# Altium PCB blackfin_pcb.PcbDoc (part 3 of 4)
Units mil, origin at the board's own origin, x right, y up, seen from the top; angles counter-clockwise.
Board outline 4330.71 x 5905.51 mil, 4 copper layers (Top Layer, GROUND, POWER, Bottom Layer), stack 59.76 mil thick; 381 components, 314 nets, 1218 pads, 647 vias.
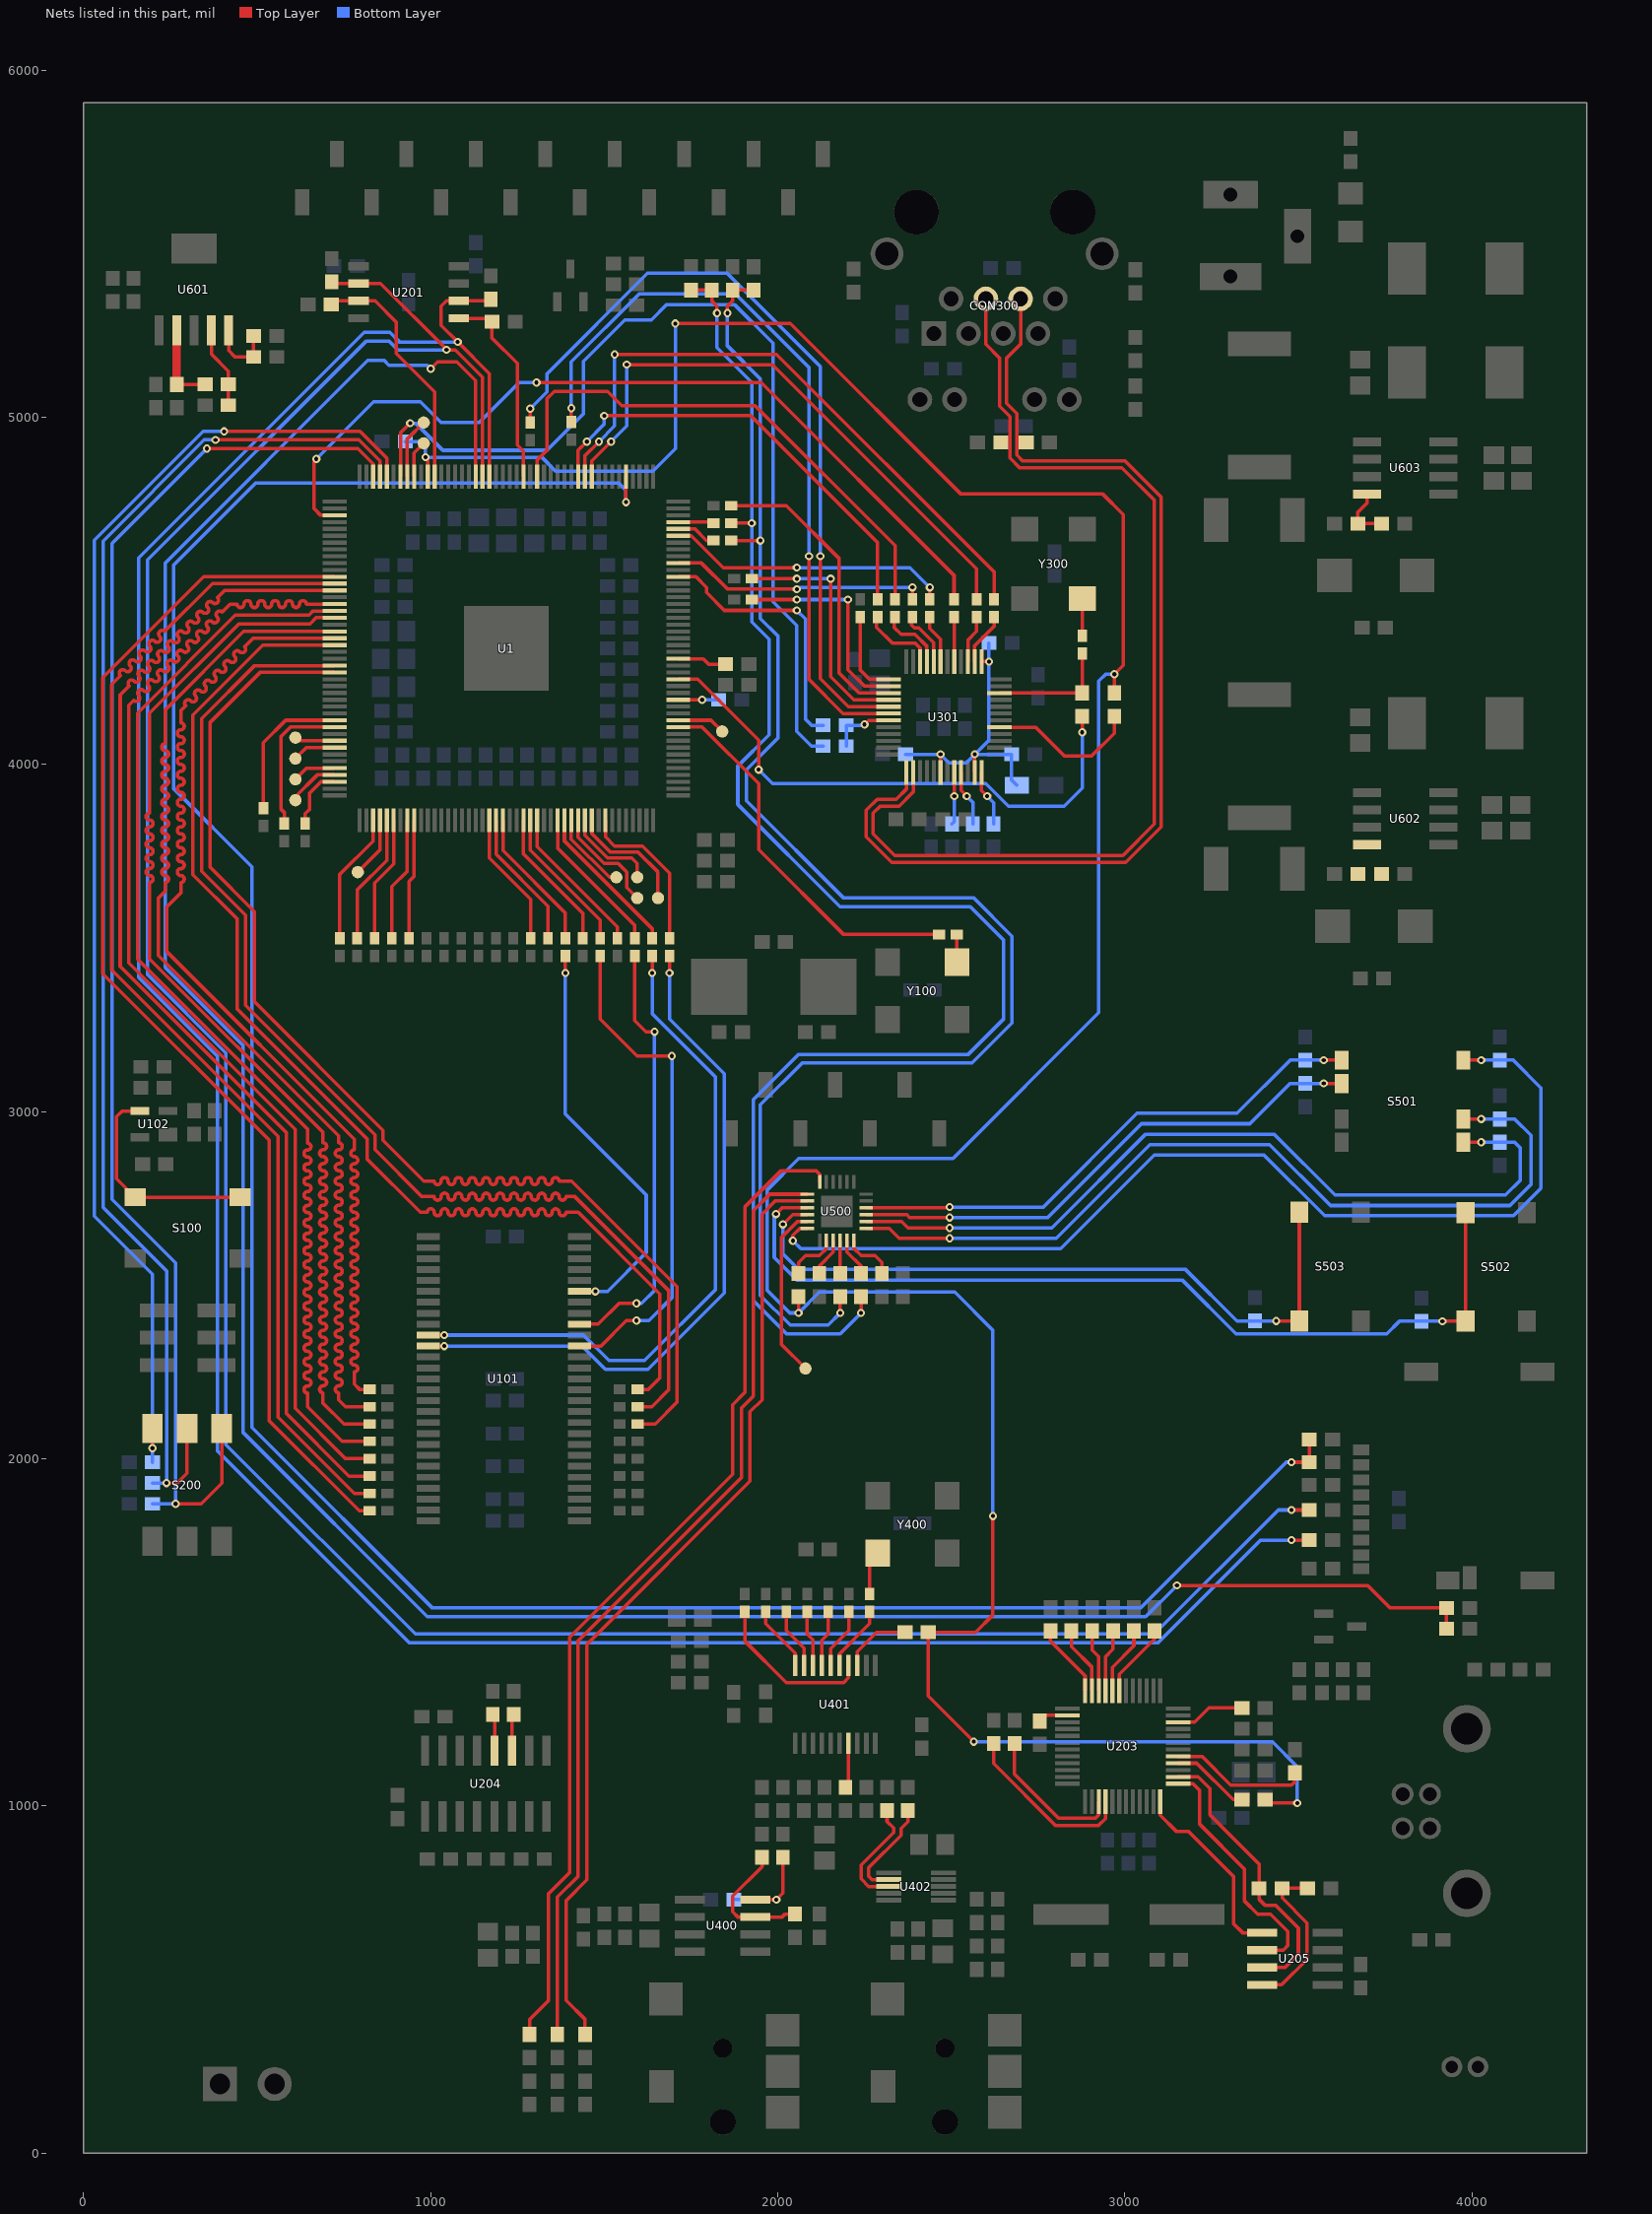
[diagram p5: the nets of this part, all layers, seen from the top]

## Via types
v1: diameter 23.62, hole 11.81, Top Layer to Bottom Layer, tented both sides, 566 vias
v2: diameter 55.12, hole 31.5, Top Layer to Bottom Layer, 36 vias
v3: diameter 25.98, hole 12.99, Top Layer to Bottom Layer, tented top, 29 vias
v4: diameter 157.48, hole 98.43, Top Layer to Bottom Layer, 8 vias
v5: diameter 137.8, hole 90.55, Top Layer to Bottom Layer, 4 vias
v6: diameter 55.12, hole 31.5, Top Layer to Bottom Layer, tented both sides, 4 vias

## Nets (pads, with @x,y where several pads share a name; then routed paths per layer and width w, separated by ;. In a path a pad name is that pad's centre, name@x,y a point inside that pad or via, vN(x,y) a via of type N, cw(c..) or ccw(c..) an arc to the next point about the centre after c; other vN are vias at no path point) (continued)
NetR111_1: R111.1 U1.70 | length 3528.7
  Top Layer w10: U1.70@723.03,4265.08 508.3,4265.08 365,4121.78 365,3703.15 491.85,3576.3 491.85,3316.82 862.55,2946.12 862.55,2917.45 980,2800 1010,2800 ccw(c1020,2800) 1030,2800 cw(c1040,2800) 1050,2800 ccw(c1060,2800) 1070,2800 cw(c1080,2800) 1090,2800 ccw(c1100,2800) 1110,2800 cw(c1120,2800) 1130,2800 ccw(c1140,2800) 1150,2800 cw(c1160,2800) 1170,2800 ccw(c1180,2800) 1190,2800 cw(c1200,2800) 1210,2800 ccw(c1220,2800) 1230,2800 cw(c1240,2800) 1250,2800 ccw(c1260,2800) 1270,2800 cw(c1280,2800) 1290,2800 ccw(c1300,2800) 1310,2800 cw(c1320,2800) 1330,2800 ccw(c1340,2800) 1350,2800 cw(c1360,2800) 1370,2800 1405.71,2800 1710,2495.71 1710,2163 1647,2100 R111.1@1595.59,2100
NetR112_2: R112.2 U1.97 | length 345.2
  Top Layer w10: R112.2@938.11,3499.57 938.11,3663.11 952.36,3677.36 U1.97@952.36,3838.9
NetR113_1: R113.1 U1.69 | length 3521.9
  Top Layer w10: U1.69@723.03,4284.76 492.63,4284.76 340,4132.13 340,3692.8 466.85,3565.95 466.85,3306.46 840,2933.31 840,2890 975,2755 1010,2755 ccw(c1020,2755) 1030,2755 cw(c1040,2755) 1050,2755 ccw(c1060,2755) 1070,2755 cw(c1080,2755) 1090,2755 ccw(c1100,2755) 1110,2755 cw(c1120,2755) 1130,2755 ccw(c1140,2755) 1150,2755 cw(c1160,2755) 1170,2755 ccw(c1180,2755) 1190,2755 cw(c1200,2755) 1210,2755 ccw(c1220,2755) 1230,2755 cw(c1240,2755) 1250,2755 ccw(c1260,2755) 1270,2755 cw(c1280,2755) 1290,2755 ccw(c1300,2755) 1310,2755 cw(c1320,2755) 1330,2755 ccw(c1340,2755) 1350,2755 cw(c1360,2755) 1370,2755 ccw(c1380,2755) 1390,2755 1415.36,2755 1685,2485.36 1685,2197.56 1637.44,2150 R113.1@1595.59,2150
NetR114_2: R114.2 U1.96 | length 357.8
  Top Layer w10: R114.2@888.11,3499.57 888.11,3648.11 932.68,3692.68 U1.96@932.68,3838.9
NetR115_1: R115.1 U1.66 | length 3531.2
  Top Layer w10: U1.66@723.03,4343.82 516.33,4343.82 315,4142.49 315,3682.44 441.85,3555.59 441.85,3296.11 816.48,2921.48 816.48,2863.52 970,2710 990,2710 cw(c1000,2710) 1010,2710 ccw(c1020,2710) 1030,2710 cw(c1040,2710) 1050,2710 ccw(c1060,2710) 1070,2710 cw(c1080,2710) 1090,2710 ccw(c1100,2710) 1110,2710 cw(c1120,2710) 1130,2710 ccw(c1140,2710) 1150,2710 cw(c1160,2710) 1170,2710 ccw(c1180,2710) 1190,2710 cw(c1200,2710) 1210,2710 ccw(c1220,2710) 1230,2710 cw(c1240,2710) 1250,2710 ccw(c1260,2710) 1270,2710 cw(c1280,2710) 1290,2710 ccw(c1300,2710) 1310,2710 cw(c1320,2710) 1330,2710 ccw(c1340,2710) 1350,2710 cw(c1360,2710) 1370,2710 ccw(c1380,2710) 1390,2710 1425,2710 1660,2475 1660,2232.56 1627.44,2200 R115.1@1595.59,2200
NetR116_2: R116.2 U1.94 | length 362.2
  Top Layer w10: R116.2@838.11,3499.57 838.11,3658.11 893.31,3713.31 U1.94@893.31,3838.9
NetR117_1: R117.1 U1.65 | length 3525.1
  Top Layer w10: U1.65@723.03,4363.5 488.5,4363.5 463.85,4338.85 cw(c456.78,4331.78) 449.71,4324.71 ccw(c442.63,4317.63) 435.56,4310.56 cw(c428.49,4303.49) 421.42,4296.42 ccw(c414.35,4289.35) 407.28,4282.28 cw(c400.21,4275.21) 393.14,4268.14 ccw(c386.07,4261.07) 378.99,4253.99 cw(c371.92,4246.92) 364.85,4239.85 ccw(c357.78,4232.78) 350.71,4225.71 cw(c343.64,4218.64) 336.57,4211.57 ccw(c329.5,4204.5) 322.43,4197.43 cw(c315.36,4190.36) 308.28,4183.28 ccw(c301.21,4176.21) 294.14,4169.14 280,4155 280,4120 cw(c280,4110) 280,4100 ccw(c280,4090) 280,4080 cw(c280,4070) 280,4060 ccw(c280,4050) 280,4040 cw(c280,4030) 280,4020 ccw(c280,4010) 280,4000 cw(c280,3990) 280,3980 ccw(c280,3970) 280,3960 cw(c280,3950) 280,3940 ccw(c280,3930) 280,3920 cw(c280,3910) 280,3900 ccw(c280,3890) 280,3880 cw(c280,3870) 280,3860 ccw(c280,3850) 280,3840 cw(c280,3830) 280,3820 ccw(c280,3810) 280,3800 cw(c280,3790) 280,3780 ccw(c280,3770) 280,3760 cw(c280,3750) 280,3740 ccw(c280,3730) 280,3720 cw(c280,3710) 280,3700 ccw(c280,3690) 280,3680 cw(c280,3670) 280,3660 280,3630 240,3590 240,3460.44 780,2920.44 780,2890 ccw(c780,2880) 780,2870 cw(c780,2860) 780,2850 ccw(c780,2840) 780,2830 cw(c780,2820) 780,2810 ccw(c780,2800) 780,2790 cw(c780,2780) 780,2770 ccw(c780,2760) 780,2750 cw(c780,2740) 780,2730 ccw(c780,2720) 780,2710 cw(c780,2700) 780,2690 ccw(c780,2680) 780,2670 cw(c780,2660) 780,2650 ccw(c780,2640) 780,2630 cw(c780,2620) 780,2610 ccw(c780,2600) 780,2590 cw(c780,2580) 780,2570 ccw(c780,2560) 780,2550 cw(c780,2540) 780,2530 ccw(c780,2520) 780,2510 cw(c780,2500) 780,2490 ccw(c780,2480) 780,2470 cw(c780,2460) 780,2450 ccw(c780,2440) 780,2430 cw(c780,2420) 780,2410 ccw(c780,2400) 780,2390 cw(c780,2380) 780,2370 ccw(c780,2360) 780,2350 cw(c780,2340) 780,2330 ccw(c780,2320) 780,2310 cw(c780,2300) 780,2290 ccw(c780,2280) 780,2270 cw(c780,2260) 780,2250 780,2215 795,2200 R117.1@824.41,2200
NetR118_2: R118.2 U1.93 | length 374.8
  Top Layer w10: R118.2@788.11,3499.57 788.11,3638.11 873.62,3723.62 U1.93@873.62,3838.9
NetR119_1: R119.1 U1.64 | length 3529.5
  Top Layer w10: U1.64@723.03,4383.19 461.01,4383.19 235,4157.17 235,4060 ccw(c235,4050) 235,4040 cw(c235,4030) 235,4020 ccw(c235,4010) 235,4000 cw(c235,3990) 235,3980 ccw(c235,3970) 235,3960 cw(c235,3950) 235,3940 ccw(c235,3930) 235,3920 cw(c235,3910) 235,3900 ccw(c235,3890) 235,3880 cw(c235,3870) 235,3860 ccw(c235,3850) 235,3840 cw(c235,3830) 235,3820 ccw(c235,3810) 235,3800 cw(c235,3790) 235,3780 ccw(c235,3770) 235,3760 cw(c235,3750) 235,3740 ccw(c235,3730) 235,3720 cw(c235,3710) 235,3700 ccw(c235,3690) 235,3680 cw(c235,3670) 235,3660 235,3635 215,3615 215,3450.09 735,2930.09 735,2910 cw(c735,2900) 735,2890 ccw(c735,2880) 735,2870 cw(c735,2860) 735,2850 ccw(c735,2840) 735,2830 cw(c735,2820) 735,2810 ccw(c735,2800) 735,2790 cw(c735,2780) 735,2770 ccw(c735,2760) 735,2750 cw(c735,2740) 735,2730 ccw(c735,2720) 735,2710 cw(c735,2700) 735,2690 ccw(c735,2680) 735,2670 cw(c735,2660) 735,2650 ccw(c735,2640) 735,2630 cw(c735,2620) 735,2610 ccw(c735,2600) 735,2590 cw(c735,2580) 735,2570 ccw(c735,2560) 735,2550 cw(c735,2540) 735,2530 ccw(c735,2520) 735,2510 cw(c735,2500) 735,2490 ccw(c735,2480) 735,2470 cw(c735,2460) 735,2450 ccw(c735,2440) 735,2430 cw(c735,2420) 735,2410 ccw(c735,2400) 735,2390 cw(c735,2380) 735,2370 ccw(c735,2360) 735,2350 cw(c735,2340) 735,2330 ccw(c735,2320) 735,2310 cw(c735,2300) 735,2290 ccw(c735,2280) 735,2270 cw(c735,2260) 735,2250 ccw(c735,2240) 735,2230 cw(c735,2220) 735,2210 ccw(c735,2200) 735,2190 735,2170 755,2150 R119.1@824.41,2150
NetR121_1: R121.1 U1.62 | length 3526
  Top Layer w10: U1.62@723.03,4422.56 669.56,4422.56 652,4405 447.47,4405 190,4147.53 190,3860 ccw(c190,3850) 190,3840 cw(c190,3830) 190,3820 ccw(c190,3810) 190,3800 cw(c190,3790) 190,3780 ccw(c190,3770) 190,3760 cw(c190,3750) 190,3740 ccw(c190,3730) 190,3720 cw(c190,3710) 190,3700 ccw(c190,3690) 190,3680 cw(c190,3670) 190,3660 190,3439.73 690,2939.73 690,2910 cw(c690,2900) 690,2890 ccw(c690,2880) 690,2870 cw(c690,2860) 690,2850 ccw(c690,2840) 690,2830 cw(c690,2820) 690,2810 ccw(c690,2800) 690,2790 cw(c690,2780) 690,2770 ccw(c690,2760) 690,2750 cw(c690,2740) 690,2730 ccw(c690,2720) 690,2710 cw(c690,2700) 690,2690 ccw(c690,2680) 690,2670 cw(c690,2660) 690,2650 ccw(c690,2640) 690,2630 cw(c690,2620) 690,2610 ccw(c690,2600) 690,2590 cw(c690,2580) 690,2570 ccw(c690,2560) 690,2550 cw(c690,2540) 690,2530 ccw(c690,2520) 690,2510 cw(c690,2500) 690,2490 ccw(c690,2480) 690,2470 cw(c690,2460) 690,2450 ccw(c690,2440) 690,2430 cw(c690,2420) 690,2410 ccw(c690,2400) 690,2390 cw(c690,2380) 690,2370 ccw(c690,2360) 690,2350 cw(c690,2340) 690,2330 ccw(c690,2320) 690,2310 cw(c690,2300) 690,2290 ccw(c690,2280) 690,2270 cw(c690,2260) 690,2250 ccw(c690,2240) 690,2230 cw(c690,2220) 690,2210 ccw(c690,2200) 690,2190 690,2160 750,2100 R121.1@824.41,2100
NetR122_2: R122.2 U1.91 | length 379.2
  Top Layer w10: R122.2@738.11,3499.57 738.11,3683.11 834.25,3779.25 U1.91@834.25,3838.9
NetR123_1: R123.1 U1.61 | length 3522.3
  Top Layer w10: U1.61@723.03,4442.24 661.41,4442.24 649.16,4430 437.11,4430 155.35,4148.24 155.35,3439.02 645,2949.38 645,2909.38 cw(c645,2899.38) 645,2889.38 ccw(c645,2879.38) 645,2869.38 cw(c645,2859.38) 645,2849.38 ccw(c645,2839.38) 645,2829.38 cw(c645,2819.38) 645,2809.38 ccw(c645,2799.38) 645,2789.38 cw(c645,2779.38) 645,2769.38 ccw(c645,2759.38) 645,2749.38 cw(c645,2739.38) 645,2729.38 ccw(c645,2719.38) 645,2709.38 cw(c645,2699.38) 645,2689.38 ccw(c645,2679.38) 645,2669.38 cw(c645,2659.38) 645,2649.38 ccw(c645,2639.38) 645,2629.38 cw(c645,2619.38) 645,2609.38 ccw(c645,2599.38) 645,2589.38 cw(c645,2579.38) 645,2569.38 ccw(c645,2559.38) 645,2549.38 cw(c645,2539.38) 645,2529.38 ccw(c645,2519.38) 645,2509.38 cw(c645,2499.38) 645,2489.38 ccw(c645,2479.38) 645,2469.38 cw(c645,2459.38) 645,2449.38 ccw(c645,2439.38) 645,2429.38 cw(c645,2419.38) 645,2409.38 ccw(c645,2399.38) 645,2389.38 cw(c645,2379.38) 645,2369.38 ccw(c645,2359.38) 645,2349.38 cw(c645,2339.38) 645,2329.38 ccw(c645,2319.38) 645,2309.38 cw(c645,2299.38) 645,2289.38 ccw(c645,2279.38) 645,2269.38 cw(c645,2259.38) 645,2249.38 ccw(c645,2239.38) 645,2229.38 cw(c645,2219.38) 645,2209.38 ccw(c645,2199.38) 645,2189.38 645,2150 745,2050 R123.1@824.41,2050
NetR124_2: R124.2 U1.86 | length 178.4
  Top Layer w10: R124.2@638.11,3829.57 638.11,3857.89 650.35,3870.14 650.35,3916.22 684.25,3950.12 U1.86@723.03,3950.12
NetR125_1: R125.1 U1.60 | length 3531.6
  Top Layer w10: U1.60@723.03,4461.93 641.93,4461.93 ccw(c631.93,4461.93) 621.93,4461.93 cw(c611.93,4461.93) 601.93,4461.93 ccw(c591.93,4461.93) 581.93,4461.93 cw(c571.93,4461.93) 561.93,4461.93 ccw(c551.93,4461.93) 541.93,4461.93 cw(c531.93,4461.93) 521.93,4461.93 ccw(c511.93,4461.93) 501.93,4461.93 cw(c491.93,4461.93) 481.93,4461.93 ccw(c471.93,4461.93) 461.93,4461.93 cw(c451.93,4461.93) 441.93,4461.93 421.93,4461.93 399.05,4439.05 ccw(c391.98,4431.98) 384.91,4424.91 cw(c377.84,4417.84) 370.77,4410.77 ccw(c363.7,4403.7) 356.63,4396.63 cw(c349.56,4389.56) 342.49,4382.49 ccw(c335.42,4375.42) 328.34,4368.34 cw(c321.27,4361.27) 314.2,4354.2 ccw(c307.13,4347.13) 300.06,4340.06 cw(c292.99,4332.99) 285.92,4325.92 ccw(c278.85,4318.85) 271.78,4311.78 cw(c264.7,4304.7) 257.63,4297.63 ccw(c250.56,4290.56) 243.49,4283.49 cw(c236.42,4276.42) 229.35,4269.35 ccw(c222.28,4262.28) 215.21,4255.21 cw(c208.14,4248.14) 201.06,4241.06 ccw(c193.99,4233.99) 186.92,4226.92 cw(c179.85,4219.85) 172.78,4212.78 ccw(c165.71,4205.71) 158.64,4198.64 cw(c151.57,4191.57) 144.5,4184.5 130.35,4170.35 130.35,3428.67 610,2949.02 610,2145 755,2000 R125.1@824.41,2000
NetR127_1: R127.1 U1.58 | length 3530.8
  Top Layer w10: U1.58@723.03,4501.3 406.3,4501.3 385.62,4480.62 cw(c378.55,4473.55) 371.48,4466.48 ccw(c364.41,4459.41) 357.34,4452.34 cw(c350.27,4445.27) 343.2,4438.2 ccw(c336.13,4431.13) 329.06,4424.06 cw(c321.99,4416.99) 314.91,4409.91 ccw(c307.84,4402.84) 300.77,4395.77 cw(c293.7,4388.7) 286.63,4381.63 ccw(c279.56,4374.56) 272.49,4367.49 cw(c265.42,4360.42) 258.35,4353.35 ccw(c251.27,4346.27) 244.2,4339.2 cw(c237.13,4332.13) 230.06,4325.06 ccw(c222.99,4317.99) 215.92,4310.92 cw(c208.85,4303.85) 201.78,4296.78 ccw(c194.71,4289.71) 187.64,4282.64 cw(c180.56,4275.56) 173.49,4268.49 ccw(c166.42,4261.42) 159.35,4254.35 cw(c152.28,4247.28) 145.21,4240.21 ccw(c138.14,4233.14) 131.07,4226.07 105.35,4200.35 105.35,3418.31 585,2938.67 585,2130 765,1950 R127.1@824.41,1950
NetR129_1: R129.1 U1.57 | length 3530.4
  Top Layer w10: U1.57@723.03,4520.98 370.98,4520.98 233.13,4383.13 ccw(c226.06,4376.06) 218.99,4368.99 cw(c211.92,4361.92) 204.85,4354.85 ccw(c197.78,4347.78) 190.71,4340.71 cw(c183.64,4333.64) 176.57,4326.57 ccw(c169.49,4319.49) 162.42,4312.42 cw(c155.35,4305.35) 148.28,4298.28 ccw(c141.21,4291.21) 134.14,4284.14 cw(c127.07,4277.07) 120,4270 ccw(c112.93,4262.93) 105.85,4255.85 80.35,4230.35 80.35,3407.96 560,2928.31 560,2120 780,1900 R129.1@824.41,1900
NetR131_1: R131.1 U1.56 | length 3524.6
  Top Layer w10: U1.56@723.03,4540.67 345.67,4540.67 55.35,4250.35 55.35,3397.6 535,2917.96 535,2109.05 794.05,1850 R131.1@824.41,1850
NetR133_2: R133.2 U1.78 | length 420.7
  Top Layer w10: R133.2@578.11,3829.57 578.11,3861.89 568.11,3871.89 568.11,4079.53 596.18,4107.6 U1.78@723.03,4107.6
NetR134_2: R134.2 U1.77 | length 420
  Top Layer w10: R134.2@518.11,3874.57 518.11,4063.11 582.28,4127.28 U1.77@723.03,4127.28
NetR135_2: R135.2 U1.119 | length 444
  Top Layer w10: U1.119@1385.43,3838.9 1385.43,3779.57 1638.11,3526.89 R135.2@1638.11,3499.57
NetR136_1: R136.1 U1.108 | length 388.7
  Top Layer w10: U1.108@1168.9,3838.9 1168.9,3731.1 1288.11,3611.89 R136.1@1288.11,3499.57
NetR137_2: R137.2 U1.113 | length 410.1
  Top Layer w10: U1.113@1267.32,3838.9 1267.32,3742.68 1438.11,3571.89 R137.2@1438.11,3499.57
NetR138_1: R138.1 U1.109 | length 401.3
  Top Layer w10: U1.109@1188.58,3838.9 1188.58,3741.42 1338.11,3591.89 R138.1@1338.11,3499.57
NetR139_2: R139.2 U1.110 | length 413.8
  Top Layer w10: U1.110@1208.27,3838.9 1208.27,3751.73 1388.11,3571.89 R139.2@1388.11,3499.57
NetR140_1: R140.1 Y100.3 | length 79.3
  Top Layer w10: Y100.3@2515.88,3430.71 R140.1@2515.88,3510
NetR140_2: R140.2 U1.143 | length 1110.3
  Top Layer w10: U1.143@1713.19,4107.6 1782.4,4107.6 1945,3945 1945,3755 2190,3510 2375,3510 R140.2@2464.7,3510
NetR141_2: R141.2 U1.114 | length 422.6
  Top Layer w10: U1.114@1287.01,3838.9 1287.01,3752.99 1488.11,3551.89 R141.2@1488.11,3499.57
NetR142_2: R142.2 U1.115 | length 435.2
  Top Layer w10: U1.115@1306.69,3838.9 1306.69,3763.31 1538.11,3531.89 R142.2@1538.11,3499.57
NetR143_2: R143.2 U1.118 | length 431.4
  Top Layer w10: U1.118@1365.75,3838.9 1365.75,3759.25 1588.11,3536.89 R143.2@1588.11,3499.57
NetR145_1: R145.1 U1.125 | length 462.6
  Top Layer w10: U1.125@1503.54,3838.9 1503.54,3791.46 1530,3765 1610,3765 1688.11,3686.89 R145.1@1688.11,3499.57
NetR147_1: R147.1 U1.147 | length 116.5
  Top Layer w10: U1.147@1713.19,4186.34 v1(1782.17,4186.34)
  Bottom Layer w10: v1(1782.17,4186.34) R147.1@1829.65,4186.34
NetR202_2: R202.2 U1.173 | length 102.5
  Top Layer w10: U1.173@1713.19,4698.15 1811.26,4698.15 R202.2@1814.41,4695
NetR203_2: R203.2 U1.172 | length 115.1
  Top Layer w10: U1.172@1713.19,4678.46 1761.54,4678.46 1795,4645 R203.2@1814.41,4645
NetR206_2: R206.2 U1.153 | length 142.9
  Top Layer w10: U1.153@1713.19,4304.45 1785.55,4304.45 1801.02,4288.98 R206.2@1849.65,4288.98
NetR208_2: R208.2 S200.3 U1.40 | length 3839.5
  Top Layer w10: v1@198.11,2030.71 S200.3@198.11,2086.98 ; v1(405,4959.37) 796.46,4959.37 873.62,4882.2 U1.40@873.62,4829.06
  Bottom Layer w10: R208.2@198.46,1990 198.46,2531.54 30.63,2699.37 30.63,4645.63 344.37,4959.37 v1(405,4959.37)
  other v1: 198.46,2030.35
NetR209_2: R209.2 S200.2 U1.41 | length 4018
  Top Layer w10: v1(238.82,1930) 270,1930 298.11,1958.11 S200.2@298.11,2086.98 ; v1(380,4935) 792.99,4935 853.94,4874.05 U1.41@853.94,4829.06
  Bottom Layer w10: R209.2@198.46,1930 v1(238.82,1930) 238.82,2541.18 56.18,2723.82 56.18,4643.44 347.74,4935 v1(380,4935)
NetR210_2: R210.2 S200.1 U1.42 | length 4145.1
  Top Layer w10: v1(265,1870) 338.39,1870 398.11,1929.72 S200.1@398.11,2086.98 ; v1(355,4910) 790.15,4910 834.25,4865.9 U1.42@834.25,4829.06
  Bottom Layer w10: R210.2@198.46,1870 v1(265,1870) 265,2563.62 81.72,2746.9 81.72,4636.72 v1(355,4910)
NetR220_1: R220.1 U203.24 | length 213.3
  Top Layer w10: R220.1@2786.02,1503.65 2786.02,1473.98 2885.51,1374.49 U203.24@2885.51,1331.56
NetR221_1: R221.1 U203.23 | length 196.6
  Top Layer w10: R221.1@2846.02,1503.65 2846.02,1458.98 2905.2,1399.8 U203.23@2905.2,1331.56
NetR222_1: R222.1 U203.22 | length 179.9
  Top Layer w10: R222.1@2906.02,1503.65 2906.02,1448.98 2924.88,1430.12 U203.22@2924.88,1331.56
NetR223_1: R223.1 U203.21 | length 181
  Top Layer w10: U203.21@2944.57,1331.56 2944.57,1429.57 2966.02,1451.02 R223.1@2966.02,1503.65
NetR225_1: R225.1 U203.20 | length 197.7
  Top Layer w10: U203.20@2964.25,1331.56 2964.25,1399.25 3026.02,1461.02 R225.1@3026.02,1503.65
NetR227_1: R227.1 U203.19 | length 214.4
  Top Layer w10: U203.19@2983.94,1331.56 2983.94,1378.94 3086.02,1481.02 R227.1@3086.02,1503.65
NetR228_2: R228.2 U203.5 | length 400.3
  Top Layer w10: U203.5@3153.23,1142.58 3222.42,1142.58 3305,1060 3480,1060 3490,1070 R228.2@3490,1095.18
NetR229_2: R229.2 U204.11 | length 106.9
  Top Layer w10: U204.11@1233.98,1158.62 1233.98,1258.43 R229.2@1238.98,1263.43
NetR230_2: R230.2 U203.10 | length 201.4
  Top Layer w10: U203.10@3153.23,1241.01 3201.01,1241.01 3242.11,1282.11 R230.2@3337.56,1282.11
NetR231_2: R231.2 U204.12 | length 99.8
  Top Layer w10: U204.12@1183.98,1158.62 R231.2@1183.98,1258.43
NetR232_1: R232.1 U203.40 | length 510.8
  Top Layer w10: R232.1@2622.18,1179.43 2622.18,1121.81 2800,944 2925,944 2944.57,963.57 U203.40@2944.57,1012.66
NetR233_1: R233.1 U203.39 | length 426.1
  Top Layer w10: R233.1@2682.18,1179.43 2682.18,1091.81 2810,964 2915,964 2924.88,973.88 U203.39@2924.88,1012.66
NetR234_2: R234.2 U203.4 | length 227.7
  Top Layer w10: U203.4@3153.23,1122.9 3207.1,1122.9 3311.89,1018.11 R234.2@3337.56,1018.11
NetR235_1: R235.1 R237.2 U205.4 | length 468
  Top Layer w10: U205.4@3395.08,484.51 3451.69,484.51 3525,557.82 3525,662.82 3453.46,734.36 R237.2@3453.46,762.82 R235.1@3526.54,762.82
NetR236_2: R236.2 U203.26 | length 86.1
  Top Layer w10: R236.2@2755,1244.46 2771.23,1260.69 U203.26@2834.33,1260.69
NetR237_1: R237.1 U203.2 U205.3 | length 826.8
  Top Layer w10: U203.2@3153.23,1083.53 3211.47,1083.53 3245,1050 3245,974 3386.54,832.46 3386.54,731.28 3405,712.82 3435,712.82 3500,647.82 3500,572.82 3461.69,534.51 U205.3@3395.08,534.51
NetR300_2: R300.2 U301.1 | length 245.1
  Top Layer w10: R300.2@2238,4424.41 2238,4272 2264.84,4245.16 U301.1@2319.53,4245.16
NetR301_2: R301.2 U301.20 | length 151.7
  Top Layer w10: v1(2508.5,3908.5) U301.20@2508.5,3977.44
  Bottom Layer w10: R301.2@2502,3828.46 2508.5,3834.97 v1(2508.5,3908.5)
NetR302_2: R302.2 U301.2 | length 615.6
  Top Layer w10: R302.2@1925.59,4475 v1(2055,4475) ; v1(2202,4475) 2202,4273 2249.53,4225.47 U301.2@2319.53,4225.47
  Bottom Layer w10: v1(2055,4475) v1(2202,4475)
NetR303_2: R303.2 U301.21 | length 163
  Top Layer w10: U301.21@2528.19,3977.44 2528.19,3924.82 v1(2544.51,3908.5)
  Bottom Layer w10: v1(2544.51,3908.5) 2562,3891.01 R303.2@2562,3828.46
NetR304_2: R304.2 U301.3 | length 870.6
  Top Layer w10: R304.2@1865.59,4745 2025,4745 2177.25,4592.75 2177.25,4262.75 2234.21,4205.79 U301.3@2319.53,4205.79
NetR305_2: R305.2 U301.4 | length 703.9
  Top Layer w10: R305.2@1925.59,4535 v1(2055,4535) ; v1(2152.5,4535) 2152.5,4252.5 2218.9,4186.1 U301.4@2319.53,4186.1
  Bottom Layer w10: v1(2055,4535) v1(2152.5,4535)
NetR306_2: R306.2 U301.24 | length 163.4
  Top Layer w10: U301.24@2587.24,3977.44 2587.24,3924.82 v1(2603.56,3908.5)
  Bottom Layer w10: v1(2603.56,3908.5) 2622,3890.07 R306.2@2622,3828.46
NetR311_2: R311.2 U301.5 | length 2308.7
  Top Layer w10: R311.2@1287.01,4984.57 v1(1287.01,5024.88) ; v1(2122.75,4600) 2122.75,4247.25 2203.58,4166.42 U301.5@2319.53,4166.42
  Bottom Layer w10: v1(1287.01,5024.88) 1335,5072.87 1335,5125 1625,5415 1853.93,5415 2122.75,5146.18 v1(2122.75,4600)
NetR312_2: R312.2 U301.6 | length 2195.8
  Top Layer w10: R312.2@1405.12,4986.06 v1(1405.12,5026.38) ; v1(2090,4600) 2090,4245 2188.27,4146.73 U301.6@2319.53,4146.73
  Bottom Layer w10: v1(1405.12,5026.38) 1405.12,5159.76 1600.36,5355 1878.58,5355 2090,5143.58 v1(2090,4600)
NetR313_2: R313.2 U301.38 | length 151
  Top Layer w10: U301.38@2567.56,4296.34 2567.56,4342.56 2623,4398 R313.2@2623,4424.41
NetR314_2: R314.2 U301.39 | length 138.5
  Top Layer w10: U301.39@2547.87,4296.34 2547.87,4357.87 2573,4383 R314.2@2573,4424.41
NetR315_2: R315.2 U301.41 | length 128.3
  Top Layer w10: R315.2@2508,4424.41 2508.5,4423.91 U301.41@2508.5,4296.34
NetR316_2: R316.2 U301.43 | length 141
  Top Layer w10: R316.2@2438,4424.41 2438,4392 2469.13,4360.87 U301.43@2469.13,4296.34
NetR317_2: R317.2 U301.44 | length 157.3
  Top Layer w10: R317.2@2385,4419.41 2385,4402.13 2393.98,4393.15 2406.85,4393.15 2449.45,4350.55 U301.44@2449.45,4296.34
NetR318_2: R318.2 U301.45 | length 185.8
  Top Layer w10: R318.2@2335,4419.41 2335,4395 2355,4375 2395,4375 2429.76,4340.24 U301.45@2429.76,4296.34
NetR319_2: R319.2 U301.46 | length 213
  Top Layer w10: R319.2@2285,4419.41 2285,4395 2330,4350 2395,4350 2410.08,4334.92 U301.46@2410.08,4296.34
NetR323_2: R323.2 R324.2 U301.34 | length 352.6
  Top Layer w10: U301.34@2638.43,4205.79 R323.2@2877.38,4205.79 R324.2@2877.38,4319.41
NetR324_1: R324.1 Y300.3 | length 107.5
  Top Layer w10: R324.1@2877.38,4370.59 Y300.3@2877.38,4478.11
NetR325_1: R325.1 U301.29 | length 441.5
  Top Layer w10: U301.29@2638.43,4107.36 2742.64,4107.36 2825,4025 2905,4025 2970,4090 R325.1@2970,4138.86
NetR326_1: R326.1 R327.1 U301.7 | length 187.9
  Top Layer w10: v1(2250,4115) 2262.05,4127.05 U301.7@2319.53,4127.05
  Bottom Layer w10: R326.1@2197.44,4052.95 R327.1@2197.44,4112.89 2247.89,4112.89 v1(2250,4115)
NetR400_1: R400.1 R402.1 U400.4 | length 313
  Top Layer w10: U400.4@1935,730 v1(1996.02,730) 2015,748.98 R402.1@2015,851.54
  Bottom Layer w10: R400.1@1873.46,730 v1(1996.02,730)
NetR401_1: R401.1 R403.2 U400.3 | length 381.5
  Top Layer w10: R401.1@1955,851.54 1955,825 1870,740 1870,695 1885,680 2012.81,680 2021.28,688.46 R403.2@2050,688.46
NetR405_2: R405.2 U401.19 | length 168.2
  Top Layer w10: R405.2@2025,1551.54 2025,1505 2075.79,1454.21 U401.19@2075.79,1404.41
NetR406_2: R406.2 U401.16 | length 168.8
  Top Layer w10: U401.16@2152.56,1404.41 2152.56,1452.56 2205,1505 R406.2@2205,1551.54
NetR407_2: R407.2 U401.18 | length 153.9
  Top Layer w10: R407.2@2085,1551.54 2085,1495 2101.38,1478.62 U401.18@2101.38,1404.41
NetR408_2: R408.2 U401.17 | length 154.6
  Top Layer w10: U401.17@2126.97,1404.41 2126.97,1476.97 2145,1495 R408.2@2145,1551.54
NetR409_2: R409.2 U401.20 | length 182.4
  Top Layer w10: R409.2@1965,1551.54 1965,1525 2050.2,1439.8 U401.20@2050.2,1404.41
NetR410_2: R410.2 U401.14 | length 466.3
  Top Layer w10: R410.2@1905,1551.54 1905,1475 2025,1355 2190,1355 2203.74,1368.74 U401.14@2203.74,1404.41
NetR411_1: R411.1 Y400.3 | length 119.6
  Top Layer w10: R411.1@2265,1618.46 2265,1705.37 Y400.3@2288.11,1728.48
NetR411_2: R411.2 U401.15 | length 183.1
  Top Layer w10: U401.15@2178.15,1404.41 2178.15,1438.15 2265,1525 R411.2@2265,1551.54
NetR412_2: R412.2 U401.13 | length 200.2
  Top Layer w10: U401.13@2229.33,1404.41 2229.33,1444.33 2285,1500 R412.2@2366.54,1500
NetR414_1: R414.1 U402.8 | length 330.8
  Top Layer w10: R414.1@2315,986.54 2315,955 2333.79,936.21 ; U402.8@2319.69,767.89 2262.11,767.89 2240,790 2240,830 2333.79,923.79 2333.79,935
NetR415_1: R415.1 U402.7 | length 297.5
  Top Layer w10: U402.7@2319.69,787.58 2272.2,787.58 2261.97,797.81 2261.97,821.97 2355,915 2355,935 2375,955 R415.1@2375,986.54
NetR502_1: R502.1 U500.21 | length 111.2
  Top Layer w10: R502.1@2120,2533.46 2120,2555 2160.08,2595.08 U500.21@2160.08,2628.11
NetR503_1: R503.1 U500.22 | length 94.7
  Top Layer w10: U500.22@2179.76,2628.11 2179.76,2533.7 R503.1@2180,2533.46
NetR504_1: R504.1 U500.23 | length 111.4
  Top Layer w10: U500.23@2199.45,2628.11 2199.45,2595.55 2240,2555 R504.1@2240,2533.46
NetR505_1: R505.1 U500.24 | length 151.6
  Top Layer w10: U500.24@2219.13,2628.11 2219.13,2605.87 2240,2585 2280,2585 2300,2565 R505.1@2300,2533.46
NetR506_1: R506.1 U500.20 | length 151.4
  Top Layer w10: R506.1@2060,2533.46 2060,2565 2080,2585 2120,2585 2140.39,2605.39 U500.20@2140.39,2628.11
NetR507_2: R507.2 S501.7 U500.4 | length 1546.4
  Top Layer w10: U500.4@2254.65,2722.68 2492.68,2722.68 v1(2495,2725) ; v1(3573.11,3148.11) S501.7@3624.8,3148.11
  Bottom Layer w10: v1(2495,2725) 2765.29,2725 3035.29,2995 3323.78,2995 3476.89,3148.11 R507.2@3520,3148.11 v1(3573.11,3148.11)
NetR508_2: R508.2 S501.6 U500.3 | length 1533.4
  Top Layer w10: U500.3@2254.65,2702.99 2372.01,2702.99 2380,2695 v1(2495,2695) ; v1(3573.11,3081.18) S501.6@3624.8,3081.18
  Bottom Layer w10: v1(2495,2695) 2777.72,2695 3047.72,2965 3360.71,2965 3476.89,3081.18 R508.2@3520,3081.18 v1(3573.11,3081.18)
NetR509_2: R509.2 S501.4 U500.2 | length 2359.3
  Top Layer w10: U500.2@2254.65,2683.31 2356.69,2683.31 2375,2665 v1(2495,2665) ; S501.4@3975.2,2911.89 v1(4026.89,2911.89)
  Bottom Layer w10: v1(2495,2665) 2790.15,2665 3060.15,2935 3430,2935 3605.43,2759.57 4096.69,2759.57 4140,2802.87 4140,2895 4123.11,2911.89 R509.2@4080,2911.89 v1(4026.89,2911.89)
NetR510_2: R510.2 S501.3 U500.1 | length 2493.1
  Top Layer w10: U500.1@2254.65,2663.62 2321.38,2663.62 2350,2635 v1(2495,2635) ; S501.3@3975.2,2978.82 v1(4026.89,2978.82)
  Bottom Layer w10: v1(2495,2635) 2802.57,2635 3072.57,2905 3417.34,2905 3592.94,2729.4 4109.19,2729.4 4170.17,2790.38 4170.17,2931.76 4123.11,2978.82 R510.2@4080,2978.82 v1(4026.89,2978.82)
NetR511_2: R511.2 S501.5 U500.18 | length 2993.6
  Top Layer w10: v1(2043.62,2628.11) 2043.62,2643.62 2063.62,2663.62 U500.18@2085.2,2663.62 ; S501.5@3975.2,3148.11 v1(4026.89,3148.11)
  Bottom Layer w10: v1(2043.62,2628.11) 2066.73,2605 2815,2605 3085,2875 3400.83,2875 3575.83,2700 4120,2700 4199.15,2779.15 4199.15,3068.03 4119.07,3148.11 v1(4026.89,3148.11)
NetR512_2: R512.2 U500.12 | length 2925.3
  Top Layer w10: R512.2@1285,341.93 1285,385 1340,440 1340,747.84 1400,807.84 1400,1485.71 1870,1955.71 1870,2155.71 1905,2190.71 1905,2725 2010,2830 2110,2830 2120.71,2819.29 U500.12@2120.71,2797.56
NetR513_2: R513.2 U500.13 | length 2781.8
  Top Layer w10: R513.2@1365,341.93 1365,737.48 1425,797.48 1425,1475.36 1895,1945.36 1895,2145.36 1930,2180.36 1930,2715 1977.05,2762.05 U500.13@2085.2,2762.05
NetR514_2: R514.2 U500.14 | length 2765.6
  Top Layer w10: R514.2@1445,341.93 1445,385 1390,440 1390,727.13 1450,787.13 1450,1465 1920,1935 1920,2135 1955,2170 1955,2705 1992.36,2742.36 U500.14@2085.2,2742.36
NetR515_2: R515.2 S502.2 U500.15 | length 2635.5
  Top Layer w10: v1(1995,2705) 2012.68,2722.68 U500.15@2085.2,2722.68 ; v1(3915.14,2396.01) S502.2@3981.83,2396.01 S502.2@3981.83,2709
  Bottom Layer w10: v1(1995,2705) 1990,2700 1990,2580 2055,2515 3165,2515 3320,2360 3755,2360 3791.01,2396.01 R515.2@3855,2396.01 v1(3915.14,2396.01)
NetR516_2: R516.2 S503.2 U500.16 | length 2047.3
  Top Layer w10: v1(2015,2675) 2042.99,2702.99 U500.16@2085.2,2702.99 ; v1(3436.14,2397.01) S503.2@3502.83,2397.01 S503.2@3502.83,2710
  Bottom Layer w10: v1(2015,2675) 2015,2590.36 2060.36,2545 3175,2545 3322.99,2397.01 R516.2@3375,2397.01 v1(3436.14,2397.01)
NetR600_1: R600.1 R602.2 U601.2 | length 237.3
  Top Layer w10: R600.1@268.11,5094.65 349.65,5094.65 R602.2@350,5095
  Top Layer w25: R600.1@268.11,5094.65 U601.2@268.11,5249.92
NetR601_1: R601.1 R603.2 U601.5 | length 197
  Top Layer w10: U601.5@418.11,5249.92 418.11,5191.89 436.02,5173.98 R601.1@489.65,5173.98 R603.2@489.65,5233.98
NetR602_1: R602.1 R604.2 U601.4 | length 235.1
  Top Layer w10: U601.4@368.11,5249.92 368.11,5181.89 416.93,5133.07 R604.2@416.93,5035
NetR606_1: R606.1 R607.2 U602.4
NetR609_1: R609.1 R611.2 U603.4 | length 164.1
  Top Layer w10: U603.4@3698.11,4778.98 3698.11,4753.11 3671.57,4726.57 R609.1@3671.57,4693.98 R611.2@3739.65,4693.98
NetS100_1: S100.1 U102.3 | length 631
  Top Layer w10: U102.3@162.4,3001.69 111.44,3001.69 95,2985.25 95,2807.09 149.11,2752.98 S100.1@451.26,2752.98
NetTP100_1: TP100.1 U1.120 | length 229.4
  Top Layer w10: U1.120@1405.12,3838.9 1405.12,3784.88 1515,3675 TP100.1@1535,3675
NetTP101_1: TP101.1 U1.123 | length 349.8
  Top Layer w10: U1.123@1464.17,3838.9 1464.17,3800.83 1518,3747 1598,3747 1655,3690 TP101.1@1655,3615
NetTP102_1: TP102.1 U1.121 | length 317.8
  Top Layer w10: U1.121@1424.8,3838.9 1424.8,3790.2 1500,3715 1540,3715 1565,3690 1565,3645 TP102.1@1595,3615
NetTP103_1: TP103.1 U1.122 | length 266.8
  Top Layer w10: U1.122@1444.49,3838.9 1444.49,3796.34 1509.83,3731 1579,3731 1595,3715 TP103.1@1595,3675
NetTP104_1: TP104.1 U1.144 | length 140.2
  Top Layer w10: U1.144@1713.19,4127.28 1807.72,4127.28 TP104.1@1840,4095
NetTP105_1: TP105.1 U1.92 | length 175.4
  Top Layer w10: TP105.1@790,3690 853.94,3753.94 U1.92@853.94,3838.9
NetTP106_1: TP106.1 U1.85 | length 148.7
  Top Layer w10: TP106.1@610.35,3897.09 610.35,3907.09 673.07,3969.8 U1.85@723.03,3969.8
NetTP107_1: TP107.1 U1.84 | length 126.1
  Top Layer w10: TP107.1@610.35,3957.09 642.76,3989.49 U1.84@723.03,3989.49
NetTP108_1: TP108.1 U1.81 | length 125.7
  Top Layer w10: TP108.1@610.35,4017.09 641.81,4048.54 U1.81@723.03,4048.54
NetTP109_1: TP109.1 U1.80 | length 116.3
  Top Layer w10: TP109.1@610.35,4077.09 619.21,4068.23 U1.80@723.03,4068.23
NetTP301_1: TP301.1 U1.37 | length 175.5
  Top Layer w10: U1.37@932.68,4829.06 932.68,4937.68 TP301.1@980,4985
NetTP302_1: TP302.1 U1.36 | length 107.4
  Top Layer w10: U1.36@952.36,4829.06 952.36,4897.36 TP302.1@980,4925
NetTP500_1: TP500.1 U500.17 | length 500.1
  Top Layer w10: TP500.1@2080,2260 2010,2330 2010,2636.61 2056.69,2683.31 U500.17@2085.2,2683.31
NetU203_1: U203.1 U205.2 | length 724.4
  Top Layer w10: U203.1@3153.23,1063.84 3196.16,1063.84 3216,1044 3216,947 3344,819 3344,727 3383.18,687.82 3420,687.82 3470,637.82 3470,597.82 3456.69,584.51 U205.2@3395.08,584.51
NetU203_48: U203.48 U205.1 | length 552.6
  Top Layer w10: U203.48@3102.05,1012.66 3102.05,972.95 3148,927 3183,927 3314,796 3314,660 3339.49,634.51 U205.1@3395.08,634.51
P\H\Y\_\I\N\T\: R327.2 U1.165 | length 772.4
  Top Layer w10: U1.165@1713.19,4540.67 1764.33,4540.67 1794.96,4510.04 1794.96,4495.04 1846.25,4443.75 v1(2055,4443.75)
  Bottom Layer w10: v1(2055,4443.75) 2080,4418.75 2080,4130 2097.11,4112.89 R327.2@2130.51,4112.89
P\W\R\_\D\O\W\N\: R326.2 U1.38 | length 2791.8
  Top Layer w10: U1.38@912.99,4829.06 912.99,4955 v1(940.98,4982.99)
  Bottom Layer w10: v1(940.98,4982.99) 957.01,4982.99 1035,4905 1335,4905 1440,5010 1440,5161.07 1559.47,5280.53 1635.53,5280.53 1680,5325 1875,5325 1986.26,5213.74 1986.26,4468.74 2055,4400 2055,4095 2097.05,4052.95 R326.2@2130.51,4052.95
PF: C305.1 C306.2 C307.2 C308.2 U301.18 U301.23 U301.37 | length 883.6
  Top Layer w10: U301.18@2469.13,3977.44 v1(2469.13,4029.13) ; U301.23@2567.56,3977.44 v1(2567.56,4029.13) ; U301.37@2587.24,4296.34 v1(2608.66,4296.34)
  Bottom Layer w10: C307.2@2368.46,4029.13 v1(2469.13,4029.13) 2493.27,4005 2543.43,4005 v1(2567.56,4029.13) ; C308.2@2608.66,4350 v1(2608.66,4296.34) 2608.66,4070.24 v1(2567.56,4029.13) ; C305.1@2688.99,3940 2673.99,3955 C306.2@2673.99,4029.13 v1(2567.56,4029.13)
PHY_OPT_CLK: R323.1 U1.150 | length 1593.5
  Top Layer w10: U1.150@1713.19,4245.39 1769.61,4245.39 1945,4070 v1(1945,3985) ; v1(2877.38,4092.38) R323.1@2877.38,4138.86
  Bottom Layer w10: v1(1945,3985) 1985,3945 2600,3945 2665,3880 2825,3880 2877.38,3932.38 v1(2877.38,4092.38)
R\E\S\E\T\: R234.1 R325.2 R328.2 R412.1 R506.2 U1.34 | length 9134.5
  Top Layer w10: v1(985,4885) 991.73,4878.27 U1.34@991.73,4829.06 ; v1(1705,5270) 2036.27,5270 2526.27,4780 2935,4780 2995,4720 2995,4285 v1(2970,4260) R325.2@2970,4205.79 ; v1(2060,2420) R506.2@2060,2466.54 ; v1(2565,1185) 2433.46,1316.54 R412.1@2433.46,1500 2570,1500 2620,1550 v1(2620,1835) ; R234.1@3404.49,1018.11 3414.49,1008.11 v1(3496.89,1008.11)
  Bottom Layer w10: R328.2@926.77,4930 965,4930 985,4910 v1(985,4885) 1320,4885 1360,4845 1640,4845 1705,4910 v1(1705,5270) ; v1(2565,1185) 3425,1185 3496.89,1113.11 v1(3496.89,1008.11) ; v1(2620,1835) 2620,2370 2510,2480 2120,2480 v1(2060,2420) 2035,2420 1970,2485 1970,2775 2060,2865 2505,2865 2925,3285 2925,4240 2945,4260 v1(2970,4260)
RD_N: CON300.6 R310.1 U301.13 | length 3083.8
  Top Layer w10: U301.13@2370.39,3977.44 2370.39,3928.68 2341.72,3900 2286.72,3900 2255,3868.28 2255,3791.72 2328.72,3718 3003,3718 3105,3820 3105,4770 3000,4875 2705,4875 2689,4891 2689,5010.65 2659.65,5040 2659.65,5170.35 2699.65,5210.35 CON300.6@2699.65,5341.43
RD_P: CON300.4 R309.1 U301.14 | length 3017.5
  Top Layer w10: U301.14@2390.39,3977.44 2390.39,3920.39 2350,3880 2295,3880 2275,3860 2275,3800 2337,3738 2994.72,3738 3085,3828.28 3085,4761.72 2991.72,4855 2696.72,4855 2669,4882.72 2669,5002.36 2639.65,5031.72 2639.65,5170.35 2599.65,5210.35 CON300.4@2599.65,5341.43
REFOUT: R413.2 U401.7 | length 130.2
  Top Layer w10: R413.2@2195,1053.46 2203.74,1062.2 U401.7@2203.74,1180
RXCLK: R313.1 U1.11 | length 1819.2
  Top Layer w10: U1.11@1444.49,4829.06 1444.49,4889.49 v1(1485,4930) ; v1(1530,5181.11) 1996.87,5181.11 2623,4554.98 R313.1@2623,4475.59
  Bottom Layer w10: v1(1485,4930) 1530,4975 v1(1530,5181.11)
RXD0: R316.1 U1.171 | length 820.8
  Top Layer w10: U1.171@1713.19,4658.78 1751.22,4658.78 1843,4567 v1(2055,4567) ; R316.1@2438,4475.59 v1(2438,4510)
  Bottom Layer w10: v1(2055,4567) 2381,4567 v1(2438,4510)
RXD1: R317.1 U1.167 | length 742.4
  Top Layer w10: U1.167@1713.19,4580.04 1779.96,4580.04 1855,4505 v1(2055,4505) ; R317.1@2388,4475.59 v1(2388,4510)
  Bottom Layer w10: v1(2055,4505) 2060,4510 v1(2388,4510)
RXD2: R318.1 U1.18 | length 1587.3
  Top Layer w10: U1.18@1306.69,4829.06 1306.69,4876.69 1335,4905 1335,5053.98 1356.02,5075 1510,5075 1551.11,5033.89 1934.47,5033.89 2338,4630.36 R318.1@2338,4475.59
RXD3: R319.1 U1.12 | length 1309.2
  Top Layer w10: U1.12@1424.8,4829.06 1424.8,4904.8 v1(1450,4930) ; v1(1500,5004.44) 1922.27,5004.44 2288,4638.72 R319.1@2288,4475.59
  Bottom Layer w10: v1(1450,4930) 1500,4980 v1(1500,5004.44)
RXDV: R314.1 U1.10 | length 1703.8
  Top Layer w10: U1.10@1464.17,4829.06 1464.17,4874.17 v1(1520,4930) ; v1(1565,5151.67) 1984.68,5151.67 2573,4563.34 R314.1@2573,4475.59
  Bottom Layer w10: v1(1520,4930) 1565,4975 v1(1565,5151.67)
RXER: R315.1 U1.47 | length 2490.6
  Top Layer w10: v1(670.65,4880.3) 663.49,4873.13 663.49,4737.34 682.99,4717.83 U1.47@723.03,4717.83 ; v1(1305,5100) 1952.57,5100 2508,4544.57 R315.1@2508,4475.59
  Bottom Layer w10: v1(670.65,4880.3) 835.36,5045 970,5045 1030,4985 1140,4985 1255,5100 v1(1305,5100)
SA10: R139.1 U101.22 | length 1190.1
  Top Layer w10: v1(1388.11,3399.33) R139.1@1388.11,3448.39 ; U101.22@1428.26,2482.13 v1(1474.44,2482.13)
  Bottom Layer w10: v1(1388.11,3399.33) 1388,3399.22 1388,2993.42 1621.02,2760.4 1621.02,2593.98 1509.17,2482.13 v1(1474.44,2482.13)
SCAS: R141.1 U101.17 | length 1453
  Top Layer w10: U101.17@1428.26,2324.65 1490.46,2324.65 1563.66,2397.84 v1(1592.95,2397.84) ; R141.1@1488.11,3448.39 1488.11,3266.89 1595,3160 v1(1695,3160)
  Bottom Layer w10: v1(1592.95,2397.84) 1628.66,2397.84 1695,2464.18 v1(1695,3160)
SCKE: R135.1 U101.37 | length 1979.4
  Top Layer w10: U101.37@993.22,2356.14 v1(1039.41,2356.14) ; v1(1638.11,3399.33) R135.1@1638.11,3448.39
  Bottom Layer w10: v1(1039.41,2356.14) 1440.37,2356.14 1513.66,2282.84 1616.02,2282.84 1821.02,2487.84 1821.02,3098.98 1638.11,3281.89 v1(1638.11,3399.33)
SCL: R200.1 R202.1 R500.2 R504.2 | length 4677.7
  Top Layer w10: R200.1@1750.18,5366.54 R500.2@1810.18,5366.54 1810.18,5334.81 1825,5320 v1(1825,5300) ; R202.1@1865.59,4695 v1(1925,4695) ; v1(2240,2420) R504.2@2240,2466.54
  Bottom Layer w10: v1(1825,5300) 1825,5200.47 1925,5100.47 ; 1925,5100 v1(1925,4695) 1925,4410.47 1975,4360.47 1975,4085.36 1885,3995.36 1885,3884.64 2179.64,3590 2554.64,3590 2650,3494.64 2650,3265.71 2549.29,3165 2060.36,3165 1930,3034.64 1930,2455.47 2025.47,2360 2180,2360 v1(2240,2420)
SCLK: R145.2 U101.38 | length 2007.8
  Top Layer w10: U101.38@993.22,2324.65 v1(1039.41,2324.65) ; v1(1688.11,3399.33) R145.2@1688.11,3448.39
  Bottom Layer w10: v1(1039.41,2324.65) 1436.51,2324.65 1503.31,2257.84 1626.38,2257.84 1846.02,2477.49 1846.02,3108.98 1688.11,3266.89 v1(1688.11,3399.33)
SDA: R201.1 R203.1 R501.2 R503.2 | length 4593.6
  Top Layer w10: v1(1855,5300) 1855,5320 1870.18,5335.18 R501.2@1870.18,5366.54 R201.1@1930.18,5366.54 ; R203.1@1865.59,4645 v1(1950,4645) ; v1(2180,2420) R503.2@2180,2466.54
  Bottom Layer w10: v1(1855,5300) 1855,5205.83 1950,5110.83 v1(1950,4645) 1950,4420.83 2000,4370.83 2000,4075 1910,3985 1910,3895 2190,3615 2565,3615 2675,3505 2675,3255.35 2559.65,3140 2070.71,3140 1950,3019.29 1950,2470.83 2035.83,2385 2145,2385 v1(2180,2420)
SMS: R143.1 U101.19 | length 1258.7
  Top Layer w10: U101.19@1428.26,2387.64 1482.75,2387.64 1542.95,2447.84 v1(1592.95,2447.84) ; R143.1@1588.11,3448.39 1588.11,3261.89 1620,3230 v1(1645,3230)
  Bottom Layer w10: v1(1592.95,2447.84) 1607.95,2447.84 1645,2484.89 v1(1645,3230)
SPI_CLK: R219.2 R240.1 U1.26 U201.6 | length 8098.8
  Top Layer w10: R219.2@715,5390.27 720,5385.27 U201.6@791.81,5385.27 855.56,5385.27 v1@1041.85,5198.98 ; v1@1046.85,5193.98 1071.02,5193.98 1149.21,5115.79 U1.26@1149.21,4829.06 ; v1(3480,1852.36) R240.1@3531.54,1852.36
  Bottom Layer w10: v1(1045.7,5194.3) 905,5194.3 879.3,5220 815,5220 183.91,4588.91 183.91,3394.94 410,3168.84 410,2040.83 955.83,1495 3085.36,1495 3442.72,1852.36 v1(3480,1852.36)
SPI_CS_FLASH: R214.1 U1.20 U201.1 | length 583.2
  Top Layer w10: U201.1@1081.18,5285.27 1166.27,5285.27 R214.1@1176.54,5275 1176.54,5228.46 1250,5155 1250,4920 1267.32,4902.68 U1.20@1267.32,4829.06
SPI_CS_MICROSD: R238.1 R245.2 U1.5 | length 7595.3
  Top Layer w10: v1(1562.6,4755.51) U1.5@1562.6,4829.06 ; v1(3480,1990) R245.2@3531.54,1990 R238.1@3531.54,2055
  Bottom Layer w10: v1(1562.6,4755.51) 1562.6,4790 1542.6,4810 495,4810 260,4575 260,3930 485,3705 485,2090 1005,1570 3045,1570 3465,1990 v1(3480,1990)
SPI_DET: R244.2 R247.1 U1.27 | length 7862.7
  Top Layer w10: v1(1000,5140) 1020,5160 1075,5160 1129.53,5105.47 U1.27@1129.53,4829.06 ; v1(3150,1635) 3700,1635 3765,1570 R244.2@3927.13,1570 R247.1@3927.13,1510
  Bottom Layer w10: v1(1000,5140) 990,5150 880,5150 866.02,5163.98 818.98,5163.98 235,4580 235,3415 460,3190 460,2075 990,1545 3060,1545 v1(3150,1635)
SPI_HOLD: R215.1 U1.33 U201.7 | length 707.8
  Top Layer w10: R215.1@713.46,5325 723.73,5335.27 U201.7@791.81,5335.27 839.73,5335.27 901,5274 901,5184 1011.42,5073.58 U1.33@1011.42,4829.06
SPI_MISO: R212.1 R241.1 U1.25 U201.2 | length 8063.7
  Top Layer w10: U1.25@1168.9,4829.06 1168.9,5126.1 v1(1077.85,5217.15) 1030,5265 1030,5320 1045.27,5335.27 U201.2@1081.18,5335.27 1168.11,5335.27 R212.1@1173.11,5340.27 ; v1(3480,1765.75) R241.1@3531.54,1765.75
  Bottom Layer w10: v1(1077.85,5217.15) 910,5217.15 882.15,5245 808.93,5245 158.36,4594.43 158.36,3386.64 385,3160 385,2023.4 938.4,1470 3095.71,1470 3391.46,1765.75 v1(3480,1765.75)